# Altium PCB USBBracket.PcbDoc
Units mm, origin at the board's own origin, x right, y up, seen from the top; angles counter-clockwise.
Board outline 12.95 x 18.16 mm, 2 copper layers (Top Layer, Bottom Layer), stack 0.671 mm thick; 3 components, 5 nets, 15 pads, 4 vias.
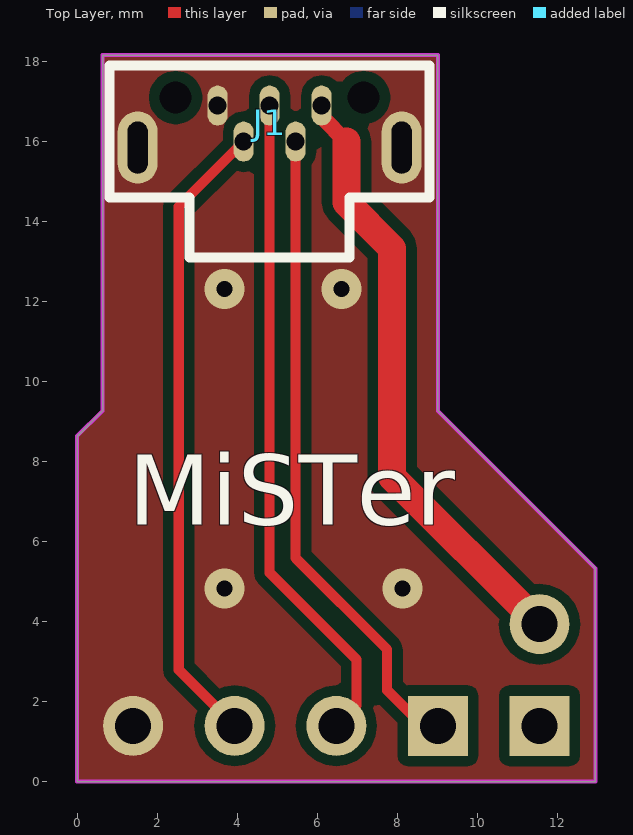
[diagram p0: Top Layer view]
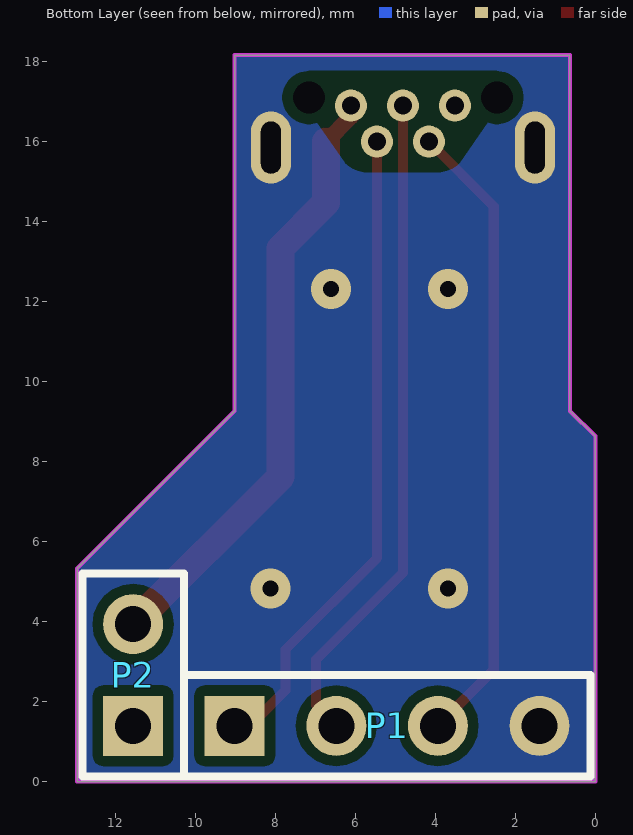
[diagram p1: Bottom Layer view, seen from below]

## Layer stack, top to bottom
Top Solder: solder mask 0.0102, Solder Resist, Dk 3.5
Top Layer: signal copper 0.0356
Dielectric 1: dielectric 0.6, FR-4, Dk 4.8
Bottom Layer: signal copper 0.0356
Bottom Solder: solder mask 0.0102, Solder Resist, Dk 3.5

## Board outline
0.635,18.161 0.635,9.271 0,8.636 0,0 12.954,0 12.954,5.334 9.017,9.271 9.017,18.161

## Design rules (kind name [scope] priority, off if disabled: settings)
BoardOutlineClearance [All] p1: gap=0 ignorepadtopadclearanceinfootprint=FALSE
Clearance keep-out_clearance [InNamedPolygon('ground') or InNamedPolygon('power') vs OnLayer('Keep-Out Layer')] p1: gap=0 ignorepadtopadclearanceinfootprint=FALSE
Clearance [All] p2: gap=0.254 ignorepadtopadclearanceinfootprint=TRUE except(0: Arc-Hole Track-Hole SMDPad-Hole THPad-Hole Via-Hole Fill-Hole Poly-Hole Region-Hole Text-Hole)
ComponentClearance [All] p1 off: gap=0.254 collisioncheckmode=3 verticalgap=0.254 showdistances=FALSE
Height [All] p1 off: minheight=0 maxheight=25.4 prefheight=12.7
HoleSize [All] p1: absolutevalues=TRUE maxlimit=6 minlimit=0.025 maxpercent=80.000 minpercent=20.000
MinimumSolderMaskSliver [All] p1: minsoldermaskwidth=0.25
PolygonConnect [All] p1: connectstyle=Direct reliefconductorwidth=0.5 reliefentries=4 polygonreliefangle="90 Angle" airgapwidth=0.254
RoutingVias [All] p1: holewidth=0.4 width=1 viastyle="Through Hole" minholewidth=0.4 minwidth=1 maxholewidth=0.4 maxwidth=1
SilkToSolderMaskClearance [IsPad] p1 off: minsilkscreentomaskgap=0.127 clearancetoexposedcopper=TRUE
SolderMaskExpansion SolderMaskExpansion_U1 [InComponent('U1')] p1: expansion=0
SolderMaskExpansion [All] p2: expansion=0.051
Width Width_power [InNetClass('power')] p1: maxlimit=2 minlimit=0.254 preferedwidth=0.508 minimp=50.000000 maximp=50.000000 favimp=50.000000
Width Width_signal [All] p2: maxlimit=0.254 minlimit=0.254 preferedwidth=0.254
25 further rules are at their usual default settings.

## Classes and differential pairs
net class power: VCC

## Components (designator, comment, footprint, x,y, rotation, side; value= is the part's Value field where it differs from the comment)
J1 "MicroUSB-L" MicroUSB-L 4.811,18.102 r180 top locked
P1 "Header 4" HDR1X4 9.017,1.397 r180 bottom locked
P2 "Header 2" HDR1X2 11.557,1.397 r90 bottom locked

## Footprints (in the part's own frame and the unit in brackets; to place one, negate y for a bottom-side part, rotate by r counter-clockwise, add the part's x,y. Pads: shape width x height; smd on the part's side, far side on the other; paste and mask are expansions set on the pad)
HDR1X2 [mm] "Connector; Header; 2 Position"
  rect 1.5x1.5 hole 0.9: 1(0,0)
  round 1.5 hole 0.9: 2(2.54,0)
  silkscreen extent -1.27,-1.27 3.81,1.27
HDR1X4 [mm] "Connector; Header; 4 Position"
  rect 1.5x1.5 hole 0.9: 1(0,0)
  round 1.5 hole 0.9: 2(2.54,0) 3(5.08,0) 4(7.62,0)
  silkscreen extent -1.27,-1.27 8.89,1.27
MicroUSB-L [mm]
  oval 0.5x1 / inner oval 0.5x1 / far side round 0.8 hole 0.45 mask+0: 1(-1.3,1.2) 2(-0.65,2.1) 3(0,1.2) 4(0.65,2.1) 5(1.3,1.2)
  oval 1x1.8 hole 0.5 slot 1.3 at 90 deg: 5(-3.3,2.25) 5(3.3,2.25)
  round 0 hole 0.8 unplated mask+0: ""(-2.35,1) ""(2.35,1)
  silkscreen extent -4,0.19 4,5

## Part data
J1: Manufacturer_Name=Molex, Manufacturer_Part_Number=47346-0001, Mouser Part Number=538-47346-0001, RS Part Number=7025475P, Allied_Number=70266948, Allied Price/Stock=https://www.alliedelec.com/molex-incorporated-47346-0001/70266948/, Datasheet Link=http://www.molex.com/pdm_docs/sd/473460001_sd.pdf, Mouser Price/Stock=https://www.mouser.com/Search/Refine.aspx?Keyword=538-47346-0001, RS Price/Stock=http://uk.rs-online.com/web/p/products/7025475P
P1: "Header, 4-Pin", LatestRevisionDate=17-Jul-2002, LatestRevisionNote="Re-released for DXP Platform.", Publisher="Altium Limited"
P2: "Header, 2-Pin", LatestRevisionDate=17-Jul-2002, LatestRevisionNote="Re-released for DXP Platform.", Publisher="Altium Limited"

## Via types
v1: diameter 1, hole 0.4, Top Layer to Bottom Layer, tented both sides, 4 vias

## Nets (pads, with @x,y where several pads share a name; then routed paths per layer and width w, separated by ;. In a path a pad name is that pad's centre, name@x,y a point inside that pad or via, vN(x,y) a via of type N, cw(c..) or ccw(c..) an arc to the next point about the centre after c; other vN are vias at no path point)
GND: J1.5 P1.4 | length 0.2
  Bottom Layer w0.254: P1.4 P1.4@1.511,1.511
  other v1: 3.683,4.826 8.128,4.826 3.683,12.319 6.604,12.319
NetJ1_2: J1.2 P1.1 | length 16.3
  Top Layer w0.254: J1.2 5.461,5.588 7.747,3.302 7.747,2.286 P1.1@8.636,1.397
  Bottom Layer w0.254: P1.1@8.636,1.397 P1.1
NetJ1_3: J1.3 P1.2 | length 16.6
  Top Layer w0.254: J1.3 4.811,5.222 6.985,3.048 6.985,1.905 P1.2
NetJ1_4: J1.4 P1.3 | length 15.9
  Top Layer w0.254: P1.3 2.54,2.794 2.54,14.381 J1.4
VCC: J1.1 P2.2 | length 15.2
  Top Layer w0.254: J1.1@6.111,16.622 J1.1
  Top Layer w0.4: J1.1@6.111,16.622 6.731,16.002
  Top Layer w0.7: 6.731,16.002 6.731,14.478 7.874,13.335 7.874,7.62 P2.2
pads on no net: J1. P2.1

## Polygon pours and split planes (outlines as drawn)
GND on Top Layer "ground" (solid, remove dead copper, pour order 33): 0.635,18.161 0.635,9.271 0,8.636 0,0 12.954,0 12.954,5.334 9.017,9.271 9.017,18.161
GND on Bottom Layer "ground" (solid, remove dead copper, pour order 32): 0.635,18.161 0.635,9.271 0,8.636 0,0 12.954,0 12.954,5.334 9.017,9.271 9.017,18.161

## Keep-outs
Keep-Out Layer:
  the board outline again, w0.1

## Other copper
Bottom Layer:
  pour cut-out: 3.395,15.47 3.404,15.461 ccw(c3.937,15.993) 3.937,15.24 5.715,15.24 ccw(c5.715,15.993) 6.248,15.461 6.257,15.47 7.161,16.761 7.161,17.769 2.461,17.769 2.461,16.804

## Silkscreen, mask and mechanical layers (free items; w line width, h text height)
Top Overlay:
  text "MiSTer" at 1.27,5.842 h3